# EAGLE board panel-100x50 (EAGLE 6.5.0)
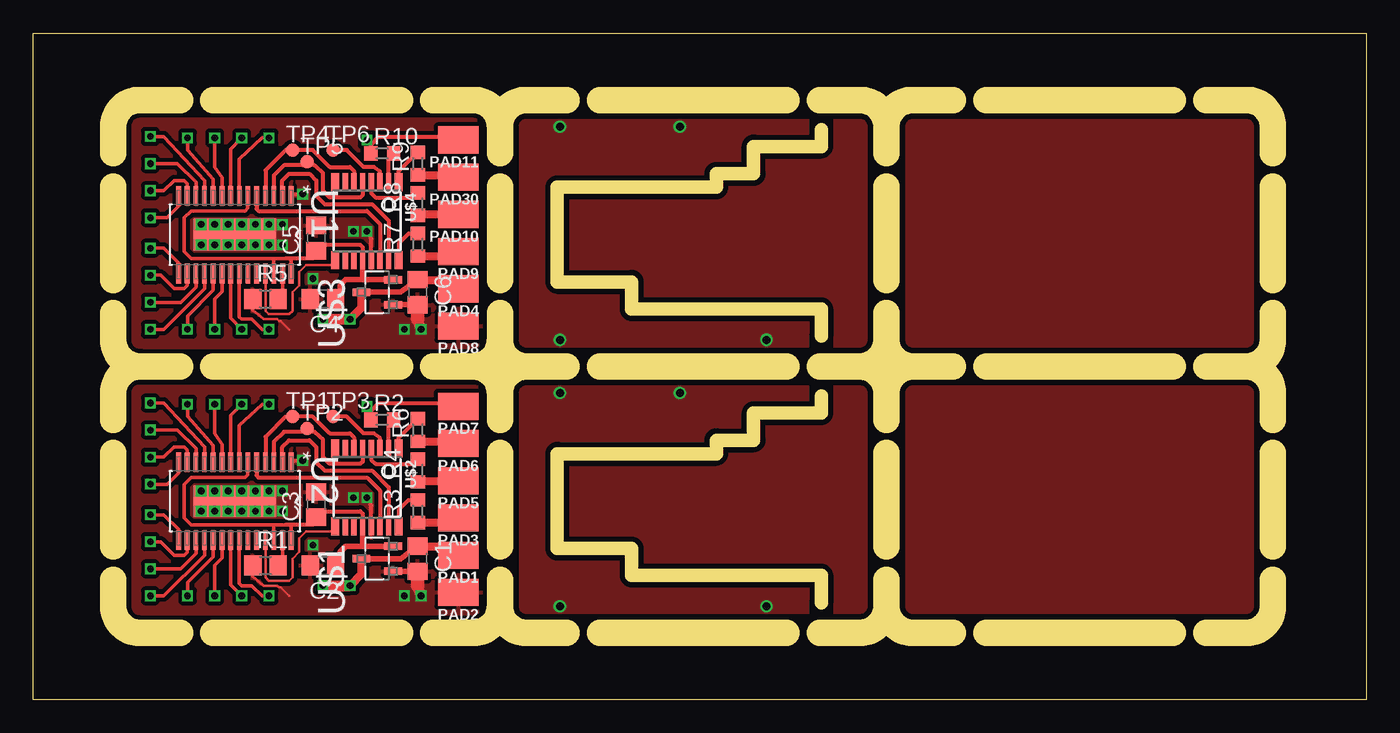
[diagram p0: board, top side]
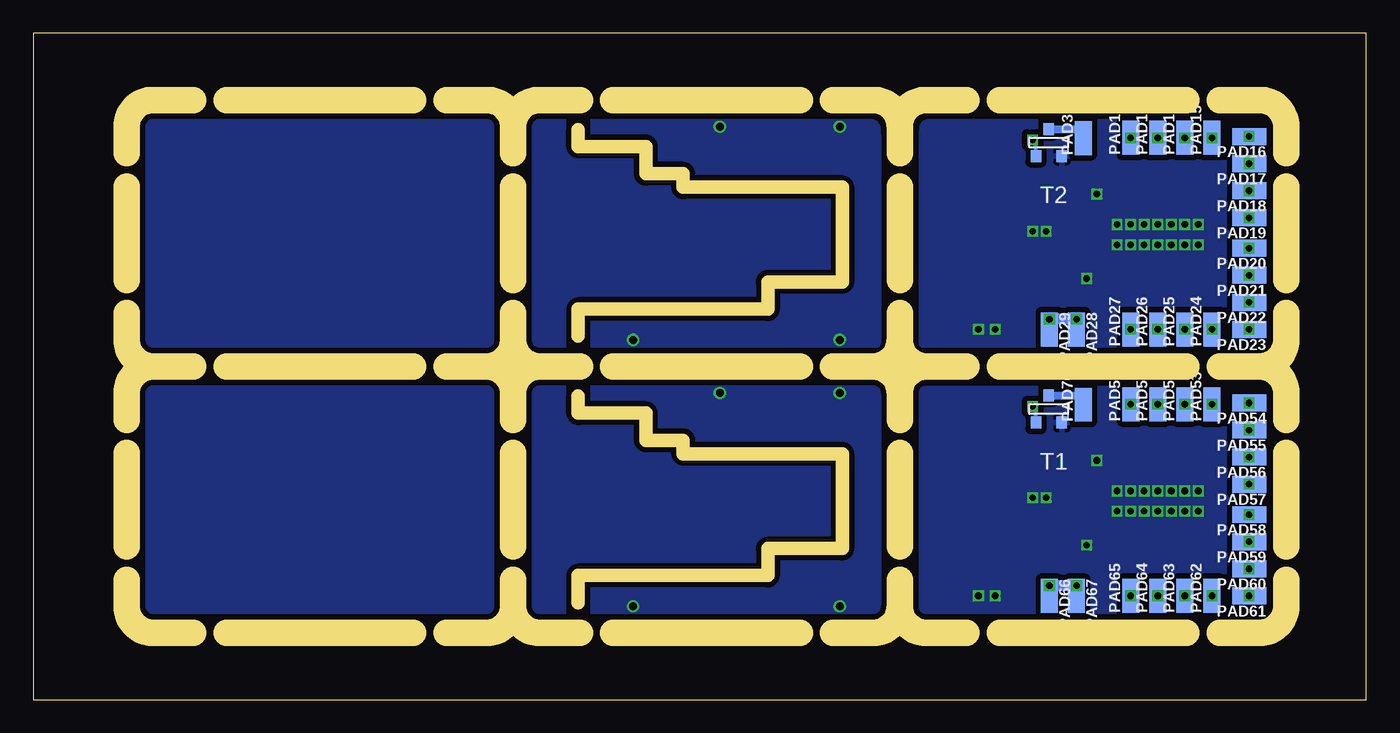
[diagram p1: board, bottom side, seen from below]

Size 100 x 50 mm. Coordinates in mm from the lower left corner, seen from the top.
Outline: 0,0 0,50 100,50 100,0 0,0
Copper layers (1*16): Top 0.035mm / dielectric 1.5mm / Bottom 0.035mm
Design rules "smart-prototyping": minimum track width 7mil, minimum drill 12mil, track to track 7mil, track to pad 7mil, pad to pad 7mil, via to via 7mil, smd to smd 0mil, copper to edge 20mil, drill to drill 10mil, minimum pad ring 10mil, minimum via ring 6mil, stop-mask expansion 2mil, vias tented up to drill 25mil, thermal gap 10mil
tRestrict: 63 lines
bRestrict: 63 lines
Milling: 97 lines

## Footprints (pad centres in the part's own frame; a part is rotated, then mirrored left to right if it is on the bottom)
C0805 = smd 1.3 x 1.5: 1 -0.95,0; 2 0.95,0
SMD80X120 = smd 2.032 x 3.048: 1 0,0
SMD50X100 = smd 1.27 x 2.54: 1 0,0
R0805 = smd 1.3 x 1.5: 1 -0.95,0; 2 0.95,0
R0603 = smd 1 x 1.1: 1 -0.85,0; 2 0.85,0
SOT-23 = smd 0.787 x 0.889: 1 0.025,-1.016; 2 -0.94,1.016; 3 0.991,1.016
TP10R = smd 1 x 1: TP 0,0
SOP65P640X120-29N = smd 1.473 x 0.356: 1 -2.921,4.216; 2 -2.921,3.581; 3 -2.921,2.921; 4 -2.921,2.286; 5 -2.921,1.626; 6 -2.921,0.965; 7 -2.921,0.33; 8 -2.921,-0.33; 9 -2.921,-0.965; 10 -2.921,-1.626; 11 -2.921,-2.286; 12 -2.921,-2.921; 13 -2.921,-3.581; 14 -2.921,-4.216; 15 2.921,-4.216; 16 2.921,-3.581; 17 2.921,-2.921; 18 2.921,-2.286; 19 2.921,-1.626; 20 2.921,-0.965; 21 2.921,-0.33; 22 2.921,0.33; 23 2.921,0.965; 24 2.921,1.626; 25 2.921,2.286; 26 2.921,2.921; 27 2.921,3.581; 28 2.921,4.216 | smd 2.388 x 6.172: 29 0,0
SOT95P300X145-3N = smd 0.559 x 1.321: 1 -0.94,-1.194; 2 0.94,-1.194; 3 0,1.194
TSSOP16 = smd 0.6 x 1.35: 1 -2.375,-2.925; 8 2.375,-2.925; 9 2.375,2.925; 16 -2.375,2.925 | smd 0.4 x 1.35: 2 -1.625,-2.918; 3 -0.975,-2.918; 4 -0.325,-2.918; 5 0.325,-2.918; 6 0.975,-2.918; 7 1.625,-2.918; 10 1.625,2.918; 11 0.975,2.918; 12 0.325,2.918; 13 -0.325,2.918; 14 -0.975,2.925; 15 -1.625,2.925

## Placement (x,y rotation side)
C1  1u  [C0805]  28.84,10.57 270 top
C2  1u  [C0805]  21.73,10.06 180 top
C3  100n  [C0805]  21.22,14.64 90 top
C4  1u  [C0805]  21.73,30.06 180 top
C5  100n  [C0805]  21.22,34.64 90 top
C6  1u  [C0805]  28.84,30.57 270 top
PAD1  +  [SMD80X120]  31.89,10.83 90 top
PAD2  -  [SMD80X120]  31.89,8.03 90 top
PAD3  ST/Rx  [SMD80X120]  31.89,13.62 90 top
PAD4  +  [SMD80X120]  31.89,30.83 90 top
PAD5  TH/Tx  [SMD80X120]  31.89,16.41 90 top
PAD6  CH3  [SMD80X120]  31.89,19.21 90 top
PAD7  OUT/ISP  [SMD80X120]  31.89,22 90 top
PAD8  -  [SMD80X120]  31.89,28.03 90 top
PAD9  ST/Rx  [SMD80X120]  31.89,33.62 90 top
PAD10  TH/Tx  [SMD80X120]  31.89,36.41 90 top
PAD11  OUT/ISP  [SMD80X120]  31.89,42 90 top
PAD12  [SMD50X100]  17.67,42.16 0 bottom
PAD13  [SMD50X100]  15.64,42.16 0 bottom
PAD14  [SMD50X100]  13.6,42.16 0 bottom
PAD15  [SMD50X100]  11.57,42.16 0 bottom
PAD16  [SMD50X100]  8.78,42.26 90 bottom
PAD17  [SMD50X100]  8.78,40.22 90 bottom
PAD18  [SMD50X100]  8.78,38.19 90 bottom
PAD19  [SMD50X100]  8.78,36.16 90 bottom
PAD20  [SMD50X100]  8.78,33.87 90 bottom
PAD21  [SMD50X100]  8.78,31.84 90 bottom
PAD22  [SMD50X100]  8.78,29.81 90 bottom
PAD23  [SMD50X100]  8.78,27.78 90 bottom
PAD24  [SMD50X100]  11.57,27.78 0 bottom
PAD25  [SMD50X100]  13.6,27.78 0 bottom
PAD26  [SMD50X100]  15.64,27.78 0 bottom
PAD27  [SMD50X100]  17.67,27.78 0 bottom
PAD28  [SMD50X100]  21.73,27.78 180 bottom
PAD29  [SMD50X100]  23.76,27.78 180 bottom
PAD30  CH3  [SMD80X120]  31.89,39.21 90 top
PAD31  [SMD50X100]  21.22,42.13 0 bottom
PAD50  [SMD50X100]  17.67,22.16 0 bottom
PAD51  [SMD50X100]  15.64,22.16 0 bottom
PAD52  [SMD50X100]  13.6,22.16 0 bottom
PAD53  [SMD50X100]  11.57,22.16 0 bottom
PAD54  [SMD50X100]  8.78,22.26 90 bottom
PAD55  [SMD50X100]  8.78,20.22 90 bottom
PAD56  [SMD50X100]  8.78,18.19 90 bottom
PAD57  [SMD50X100]  8.78,16.16 90 bottom
PAD58  [SMD50X100]  8.78,13.87 90 bottom
PAD59  [SMD50X100]  8.78,11.84 90 bottom
PAD60  [SMD50X100]  8.78,9.81 90 bottom
PAD61  [SMD50X100]  8.78,7.78 90 bottom
PAD62  [SMD50X100]  11.57,7.78 0 bottom
PAD63  [SMD50X100]  13.6,7.78 0 bottom
PAD64  [SMD50X100]  15.64,7.78 0 bottom
PAD65  [SMD50X100]  17.67,7.78 0 bottom
PAD66  [SMD50X100]  23.76,7.78 180 bottom
PAD67  [SMD50X100]  21.73,7.78 180 bottom
PAD70  [SMD50X100]  21.22,22.13 0 bottom
R1  2k0=20mA  [R0805]  17.41,10.06 0 top
R2  1k  [R0603]  26.18,20.99 0 top
R3  1k  [R0603]  28.84,14.13 90 top
R4  1k  [R0603]  28.84,17.18 90 top
R5  2k0=20mA  [R0805]  17.41,30.06 0 top
R6  1k  [R0603]  28.84,20.22 90 top
R7  1k  [R0603]  28.84,34.13 90 top
R8  1k  [R0603]  28.84,37.18 90 top
R9  1k  [R0603]  28.84,40.22 90 top
R10  1k  [R0603]  26.18,40.99 0 top
T1  [SOT-23]  23.79,21.8 180 bottom
T2  [SOT-23]  23.79,41.8 180 bottom
TP1  SWDIO  [TP10R]  19.45,21.24 0 top
TP2  SWCLK  [TP10R]  20.53,20.35 0 top
TP3  RESET  [TP10R]  22.49,21.24 0 top
TP4  SWDIO  [TP10R]  19.45,41.24 0 top
TP5  SWCLK  [TP10R]  20.53,40.35 0 top
TP6  RESET  [TP10R]  22.49,41.24 0 top
U1  TLC5940PWP  [SOP65P640X120-29N]  15.13,34.89 270 top
U2  TLC5940PWP  [SOP65P640X120-29N]  15.13,14.89 270 top
U$1  3V3  [SOT95P300X145-3N]  25.8,10.57 90 top
U$2  LPC812  [TSSOP16]  25.03,15.91 180 top
U$3  3V3  [SOT95P300X145-3N]  25.8,30.57 90 top
U$4  LPC812  [TSSOP16]  25.03,35.91 180 top

## Library data of the parts
C1-C6 R1-R10 = rcl
PAD1-PAD31 PAD50-PAD67 PAD70 = wirepad
T1 T2 = zetex; OC_FARNELL: unknown; OC_NEWARK: unknown
TP1-TP6 = testpad
U1 U2 = tlc5940; MPN: TLC5940PWP; PACKAGE: HTSSOP-28; SUPPLIER: Texas Instruments
U$1 U$3 = MCP1703; MPN: MCP1703T-3302E/CB; OC_FARNELL: 1439518; OC_NEWARK: 40M0637; PACKAGE: SOT-3; SUPPLIER: Microchip
U$2 U$4 = LPC810

## Nets
+3V1: C4.1 C5.1 U1.6 U1.26 U1.28 U$3.2 U$4.12
+3V3: C2.1 C3.1 U2.6 U2.26 U2.28 U$1.2 U$2.12
BLANK: U2.2 U$2.15
BLANK1: U1.2 U$4.15
CH1: R9.2 U$4.1
CH3: R6.2 U$2.1
GND: C1.2 C2.2 C3.2 PAD2.1 R1.1 T1.2 U2.1 U2.29 U$1.1 U$2.13
GND1: C4.2 C5.2 C6.2 PAD8.1 R5.1 T2.2 U1.1 U1.29 U$3.1 U$4.13
GSCLK: U2.25 U$2.9
GSCLK1: U1.25 U$4.9
IREF: R1.2 U2.27
IREF1: R5.2 U1.27
N$1: PAD6.1 R6.1
N$2: PAD7.1 R2.1 T1.3
N$3: PAD70.1 T1.1
N$4: TP3.TP U$2.3
N$5: PAD9.1 R7.1
N$6: PAD10.1 R8.1
N$7: PAD30.1 R9.1
N$8: TP6.TP U$4.3
N$9: PAD31.1 T2.1
N$10: PAD11.1 R10.1 T2.3
N$17: PAD3.1 R3.1
N$18: PAD5.1 R4.1
OUT0: PAD50.1 U2.7
OUT1: PAD51.1 U2.8
OUT2: PAD52.1 U2.9
OUT3: PAD53.1 U2.10
OUT4: PAD54.1 U2.11
OUT5: PAD55.1 U2.12
OUT6: PAD56.1 U2.13
OUT7: PAD57.1 U2.14
OUT8: PAD58.1 U2.15
OUT9: PAD59.1 U2.16
OUT10: PAD60.1 U2.17
OUT11: PAD61.1 U2.18
OUT12: PAD62.1 U2.19
OUT13: PAD63.1 U2.20
OUT14: PAD64.1 U2.21
OUT15: PAD65.1 U2.22
OUT16: PAD12.1 U1.7
OUT17: PAD13.1 U1.8
OUT18: PAD14.1 U1.9
OUT19: PAD15.1 U1.10
OUT20: PAD27.1 U1.22
OUT21: PAD26.1 U1.21
OUT22: PAD25.1 U1.20
OUT23: PAD24.1 U1.19
OUT24: PAD23.1 U1.18
OUT25: PAD22.1 U1.17
OUT26: PAD21.1 U1.16
OUT27: PAD20.1 U1.15
OUT28: PAD19.1 U1.14
OUT29: PAD18.1 U1.13
OUT30: PAD17.1 U1.12
OUT31: PAD16.1 U1.11
OUT/ISP: R2.2 U$2.2
OUT/ISP1: R10.2 U$4.2
SCLK: TP1.TP U2.4 U$2.6
SCLK1: TP4.TP U1.4 U$4.6
SIN: U2.5 U$2.14
SIN1: U1.5 U$4.14
ST/RX: R3.2 U$2.16
ST/RX1: R7.2 U$4.16
TH/TX: R4.2 U$2.4
TH/TX1: R8.2 U$4.4
VIN: C1.1 PAD1.1 PAD66.1 PAD67.1 U$1.3
VIN1: C6.1 PAD4.1 PAD28.1 PAD29.1 U$3.3
XLAT: TP2.TP U2.3 U$2.5
XLAT1: TP5.TP U1.3 U$4.5

## Tracks (layer width: path | path; a pad name or v marks a point on that pad's centre or on a via)
+3V1
  Top 0.254: U1.28 19.34,32.96 19.19,33.11 18.94,33.11 18.18,33.11 | 18.18,33.11 18.05,32.98 U1.26 | 18.18,33.11 11.83,33.11 11.32,33.62 11.32,36.16 11.83,36.67 15.89,36.67 16.09,36.87 U1.6
  Top 0.305: 24.71,31.58 24.78,31.51 | 23,30.38 C4.1 | 21.22,33.37 21.73,34.13 24.53,34.13 24.71,33.95 U$4.12 | 18.94,33.11 20.97,33.11 21.22,33.37 | 21.22,33.37 C5.1
  Top 0.406: U$3.2 24.78,31.51 23.43,31.51 23,31.08 23,30.38 | U$4.12 24.71,31.58
+3V3
  Top 0.254: U2.28 19.34,12.96 19.19,13.11 18.94,13.11 18.18,13.11 | 18.18,13.11 18.05,12.98 U2.26 | 18.18,13.11 11.83,13.11 11.32,13.62 11.32,16.16 11.83,16.67 15.89,16.67 16.09,16.87 U2.6
  Top 0.305: 24.71,11.58 24.78,11.51 | 23,10.38 C2.1 | 21.22,13.37 21.73,14.13 24.53,14.13 24.71,13.95 U$2.12 | 18.94,13.11 20.97,13.11 21.22,13.37 | 21.22,13.37 C3.1
  Top 0.406: U$1.2 24.78,11.51 23.43,11.51 23,11.08 23,10.38 | U$2.12 24.71,11.58
BLANK
  Top 0.305: U2.2 18.68,17.84 18.68,18.95 19.19,19.46 20.72,19.46 21.22,18.95 21.22,17.81 21.86,17.18 25.41,17.18 26.66,15.93 U$2.15
BLANK1
  Top 0.305: U1.2 18.68,37.84 18.68,38.95 19.19,39.46 20.72,39.46 21.22,38.95 21.22,37.81 21.86,37.18 25.41,37.18 26.66,35.93 U$4.15
CH1
  Top 0.305: U$4.1 27.41,39.64 R9.2
CH3
  Top 0.305: U$2.1 27.41,19.64 R6.2
GND  (via drill 0.5)
  Top 0.203: 16.46,9.24 17.29,8.54 18.3,8.54 18.43,8.41 18.56,8.41 19.19,7.78
  Top 0.254: R1.1 16.46,9.24
  Top 0.305: U2.1 19.47,17.94 v20.21,17.94 | v14.62,14.13 15.13,14.64 U2.29 | U$2.13 25.36,14.56 25.29,14.64
  Top 0.406: U$1.1 28.83,9.63 C1.2
  Top 0.813: v29.1,7.78 28.84,8.54
  Top 1: 28.84,8.54 C1.2
  other vias: 15.64,15.65 16.65,15.65 12.59,15.65 13.6,15.65 14.62,15.65 17.67,15.65 17.67,14.13 16.65,14.13 15.64,14.13 13.6,14.13 12.59,14.13 27.83,7.78 20.97,11.59 18.68,15.65 18.68,14.13 24.02,15.14 25.03,15.14
  pour Bottom (isolate 0.406): 7,24 34,24 34,6 7,6
  pour Top (isolate 0.305): 7,24 34,24 34,6 7,6
GND1  (via drill 0.5)
  Top 0.203: 16.46,29.24 17.29,28.54 18.3,28.54 18.43,28.41 18.56,28.41 19.19,27.78
  Top 0.254: R5.1 16.46,29.24
  Top 0.305: U1.1 19.47,37.94 v20.21,37.94 | v14.62,34.13 15.13,34.64 U1.29 | U$4.13 25.36,34.56 25.29,34.64
  Top 0.406: U$3.1 28.83,29.63 C6.2
  Top 0.813: v29.1,27.78 28.84,28.54
  Top 1: 28.84,28.54 C6.2
  other vias: 15.64,35.65 16.65,35.65 12.59,35.65 13.6,35.65 14.62,35.65 17.67,35.65 17.67,34.13 16.65,34.13 15.64,34.13 13.6,34.13 12.59,34.13 27.83,27.78 20.97,31.59 18.68,35.65 18.68,34.13 24.02,35.14 25.03,35.14
  pour Bottom (isolate 0.406): 7,44 34,44 34,26 7,26
  pour Top (isolate 0.305): 7,44 34,44 34,26 7,26
GND2  (via drill 0.6)
  other vias: 39.5,23 48.5,23 55,7 39.5,7
  pour Top (isolate 0.406): 36,24 36,6 63,6 63,24
  pour Bottom (isolate 0.406): 36,6 63,6 63,24 36,24
GND3  (via drill 0.6)
  other vias: 39.5,43 48.5,43 55,27 39.5,27
  pour Top (isolate 0.406): 36,44 36,26 63,26 63,44
  pour Bottom (isolate 0.406): 36,26 63,26 63,44 36,44
GSCLK
  Top 0.203: U2.25 17.41,9.18 17.67,8.92 19.19,8.92 19.45,9.18 19.45,10.57 19.95,11.08 19.95,12.1 20.46,12.6 22.66,12.6 U$2.9
GSCLK1
  Top 0.203: U1.25 17.41,29.18 17.67,28.92 19.19,28.92 19.45,29.18 19.45,30.57 19.95,31.08 19.95,32.1 20.46,32.6 22.66,32.6 U$4.9
IREF
  Top 0.254: U2.27 18.71,10.11 R1.2
IREF1
  Top 0.254: U1.27 18.71,30.11 R5.2
N$1
  Top 0.61: R6.1 31.47,19.37 PAD6.1
N$2  (via drill 0.5)
  Top 0.305: PAD7.1 31.38,22.26 25.92,22.26 25.33,21.66 R2.1 25.33,21.71 v25.03,22
  Bottom 0.305: T1.3 24.78,21.75 v25.03,22
N$3
  Bottom 0.61: T1.1 21.22,22.82 PAD70.1
N$4
  Top 0.305: U$2.3 26.01,19.63 25.54,19.97 24.78,19.97 23.51,21.24 TP3.TP
N$5
  Top 0.406: 31.04,33.02 31.26,33.24 | 31.26,33.24 PAD9.1 | 31.22,33.28 31.26,33.24
  Top 0.61: R7.1 31.22,33.28
N$6
  Top 0.406: 31.3,36.07 PAD10.1 | R8.1 29.19,36.41
  Top 0.61: 29.19,36.41 PAD10.1
N$7
  Top 0.61: R9.1 31.47,39.37 PAD30.1
N$8
  Top 0.305: U$4.3 26.01,39.63 25.54,39.97 24.78,39.97 23.51,41.24 TP6.TP
N$9
  Bottom 0.61: T2.1 21.22,42.82 PAD31.1
N$10  (via drill 0.5)
  Top 0.305: PAD11.1 31.38,42.26 25.92,42.26 25.33,41.66 R10.1 25.33,41.71 v25.03,42
  Bottom 0.305: T2.3 24.78,41.75 v25.03,42
N$17
  Top 0.406: 31.04,13.02 31.26,13.24 | 31.26,13.24 PAD3.1 | 31.22,13.28 31.26,13.24
  Top 0.61: R3.1 31.22,13.28
N$18
  Top 0.406: 31.3,16.07 PAD5.1 | R4.1 29.19,16.41
  Top 0.61: 29.19,16.41 PAD5.1
OUT0  (via drill 0.5)
  Top 0.254: U2.7 15.46,20.55 17.16,22.16 PAD50.1
  other vias: 17.67,22.16
OUT1  (via drill 0.5)
  Top 0.254: U2.8 14.8,21.32 PAD51.1
  other vias: 15.64,22.16
OUT2  (via drill 0.5)
  Top 0.254: U2.9 14.16,19.16 13.6,19.97 PAD52.1
  other vias: 13.6,22.16
OUT3  (via drill 0.5)
  Top 0.254: U2.10 13.5,19.06 11.57,21.24 PAD53.1
  other vias: 11.57,22.16
OUT4  (via drill 0.5)
  Top 0.254: U2.11 12.84,18.95 9.79,22.26 PAD54.1
  other vias: 8.78,22.26
OUT5  (via drill 0.5)
  Top 0.254: U2.12 12.21,18.83 10.81,20.22 PAD55.1
  other vias: 8.78,20.22
OUT6  (via drill 0.5)
  Top 0.254: U2.13 11.55,18.73 11.32,18.95 10.56,18.95 9.79,18.19 PAD56.1
  other vias: 8.78,18.19
OUT7  (via drill 0.5)
  Top 0.254: U2.14 10.91,17.02 10.05,16.16 PAD57.1
  other vias: 8.78,16.16
OUT8  (via drill 0.5)
  Top 0.254: U2.15 10.91,12.76 9.79,13.87 PAD58.1
  other vias: 8.78,13.87
OUT9  (via drill 0.5)
  Top 0.254: U2.16 11.55,11.05 11.32,10.83 10.56,10.83 9.54,11.84 PAD59.1
  other vias: 8.78,11.84
OUT10  (via drill 0.5)
  Top 0.254: U2.17 12.21,10.95 11.06,9.81 PAD60.1
  other vias: 8.78,9.81
OUT11  (via drill 0.5)
  Top 0.254: U2.18 12.84,10.83 9.79,7.78 PAD61.1
  other vias: 8.78,7.78
OUT12  (via drill 0.5)
  Top 0.254: U2.19 13.5,10.72 11.57,8.79 PAD62.1
  other vias: 11.57,7.78
OUT13  (via drill 0.5)
  Top 0.254: U2.20 14.16,10.62 13.6,10.06 PAD63.1
  other vias: 13.6,7.78
OUT14  (via drill 0.5)
  Top 0.254: U2.21 14.8,8.62 PAD64.1
  other vias: 15.64,7.78
OUT15  (via drill 0.5)
  Top 0.254: U2.22 15.46,8.72 15.64,8.54 16.4,8.54 17.16,7.78 PAD65.1
  other vias: 17.67,7.78
OUT16  (via drill 0.5)
  Top 0.254: U1.7 15.46,40.55 17.16,42.16 PAD12.1
  other vias: 17.67,42.16
OUT17  (via drill 0.5)
  Top 0.254: U1.8 14.8,41.32 PAD13.1
  other vias: 15.64,42.16
OUT18  (via drill 0.5)
  Top 0.254: U1.9 14.16,39.16 13.6,39.97 PAD14.1
  other vias: 13.6,42.16
OUT19  (via drill 0.5)
  Top 0.254: U1.10 13.5,39.06 11.57,41.24 PAD15.1
  other vias: 11.57,42.16
OUT20  (via drill 0.5)
  Top 0.254: U1.22 15.46,28.72 15.64,28.54 16.4,28.54 17.16,27.78 PAD27.1
  other vias: 17.67,27.78
OUT21  (via drill 0.5)
  Top 0.254: U1.21 14.8,28.62 PAD26.1
  other vias: 15.64,27.78
OUT22  (via drill 0.5)
  Top 0.254: U1.20 14.16,30.62 13.6,30.06 PAD25.1
  other vias: 13.6,27.78
OUT23  (via drill 0.5)
  Top 0.254: U1.19 13.5,30.72 11.57,28.79 PAD24.1
  other vias: 11.57,27.78
OUT24  (via drill 0.5)
  Top 0.254: U1.18 12.84,30.83 9.79,27.78 PAD23.1
  other vias: 8.78,27.78
OUT25  (via drill 0.5)
  Top 0.254: U1.17 12.21,30.95 11.06,29.81 PAD22.1
  other vias: 8.78,29.81
OUT26  (via drill 0.5)
  Top 0.254: U1.16 11.55,31.05 11.32,30.83 10.56,30.83 9.54,31.84 PAD21.1
  other vias: 8.78,31.84
OUT27  (via drill 0.5)
  Top 0.254: U1.15 10.91,32.76 9.79,33.87 PAD20.1
  other vias: 8.78,33.87
OUT28  (via drill 0.5)
  Top 0.254: U1.14 10.91,37.02 10.05,36.16 PAD19.1
  other vias: 8.78,36.16
OUT29  (via drill 0.5)
  Top 0.254: U1.13 11.55,38.73 11.32,38.95 10.56,38.95 9.79,38.19 PAD18.1
  other vias: 8.78,38.19
OUT30  (via drill 0.5)
  Top 0.254: U1.12 12.21,38.83 10.81,40.22 PAD17.1
  other vias: 8.78,40.22
OUT31  (via drill 0.5)
  Top 0.254: U1.11 12.84,38.95 9.79,42.26 PAD16.1
  other vias: 8.78,42.26
OUT/ISP
  Top 0.305: U$2.2 26.66,20.62 R2.2
OUT/ISP1
  Top 0.305: U$4.2 26.66,40.62 R10.2
S$1
  pour Top (isolate 0.406): 65,44 92,44 92,26 65,26
  pour Bottom (isolate 0.406): 65,44 92,44 92,26 65,26
S$2
  pour Top (isolate 0.406): 65,24 92,24 92,6 65,6
  pour Bottom (isolate 0.406): 65,24 92,24 92,6 65,6
SCLK
  Top 0.305: U2.4 17.41,19.72 18.94,21.24 TP1.TP 20.97,21.24 22.24,19.97 23.76,19.97 24.06,19.68 U$2.6
SCLK1
  Top 0.305: U1.4 17.41,39.72 18.94,41.24 TP4.TP 20.97,41.24 22.24,39.97 23.76,39.97 24.06,39.67 U$4.6
SIN
  Top 0.305: U2.5 16.75,16.82 16.91,16.67 25.03,16.67 26.01,15.69 U$2.14
SIN1
  Top 0.305: U1.5 16.75,36.82 16.91,36.67 25.03,36.67 26.01,35.69 U$4.14
ST/RX
  Top 0.305: U$2.16 27.41,14.22 28.17,14.98 R3.2
ST/RX1
  Top 0.305: U$4.16 27.41,34.22 28.17,34.98 R7.2
TH/TX
  Top 0.305: U$2.4 25.36,17.99 25.67,17.68 28.5,17.68 R4.2
TH/TX1
  Top 0.305: U$4.4 25.36,37.99 25.67,37.68 28.5,37.68 R8.2
VIN  (via drill 0.5)
  Top 0.305: 28.46,11.46 28.78,11.78 C1.1 | 31,11.46 31.64,11.46 PAD1.1
  Top 0.406: U$1.3 27.57,10.57 C1.1
  Top 0.61: 31,11.46 28.46,11.46 | U$1.3 24.6,9.38 v23.76,8.54
  Top 0.813: v21.73,8.54 v23.76,8.54
  Bottom 0.813: v23.76,8.54 23.85,7.86 23.76,7.86 PAD66.1 v23.76,8.54 | PAD67.1 v21.73,8.54 v23.76,8.54
VIN1  (via drill 0.5)
  Top 0.305: 28.46,31.46 28.78,31.78 C6.1 | 31,31.46 31.64,31.46 PAD4.1
  Top 0.406: U$3.3 27.57,30.57 C6.1
  Top 0.61: 31,31.46 28.46,31.46 | U$3.3 24.6,29.38 v23.76,28.54
  Top 0.813: v21.73,28.54 v23.76,28.54
  Bottom 0.813: v23.76,28.54 23.85,27.86 23.76,27.86 PAD29.1 v23.76,28.54 | PAD28.1 v21.73,28.54 v23.76,28.54
XLAT
  Top 0.305: 20.21,20.1 21.1,20.1 21.73,19.5 21.73,18.19 22.24,17.68 24.53,17.68 24.71,17.87 U$2.5 | 20.21,20.1 18.81,20.1 18.05,19.34 U2.3 | 20.21,20.1 20.27,20.16 20.4,20.16 TP2.TP
XLAT1
  Top 0.305: 20.21,40.1 21.1,40.1 21.73,39.5 21.73,38.19 22.24,37.68 24.53,37.68 24.71,37.87 U$4.5 | 20.21,40.1 18.81,40.1 18.05,39.34 U1.3 | 20.21,40.1 20.27,40.16 20.4,40.16 TP5.TP

## Text on the board
tValues: . | LANE Boys RC | OUT/ISP | . | RC car light controller | CH3 | TLC5940 + LPC812 | TH/Tx | http://goo.gl/Vif9VM | ST/Rx | + | Rev 1 | - | . | LANE Boys RC | OUT/ISP | . | RC car light controller | CH3 | TLC5940 + LPC812 | TH/Tx | http://goo.gl/Vif9VM | ST/Rx | + | Rev 1 | -
bValues: 5 | 3 | 2 | 1 | 0 | 6 | LANE Boys RC | 7 | RC light controller | 8 | 9 | 10 | 12 | 13 | 14 | 15 | +LED | 4...10V | 5 | 3 | 2 | 1 | 0 | 6 | LANE Boys RC | 7 | RC light controller | 8 | 9 | 10 | 12 | 13 | 14 | 15 | +LED | 4...10V